# EAGLE board Sensor Board (EAGLE 6.4)
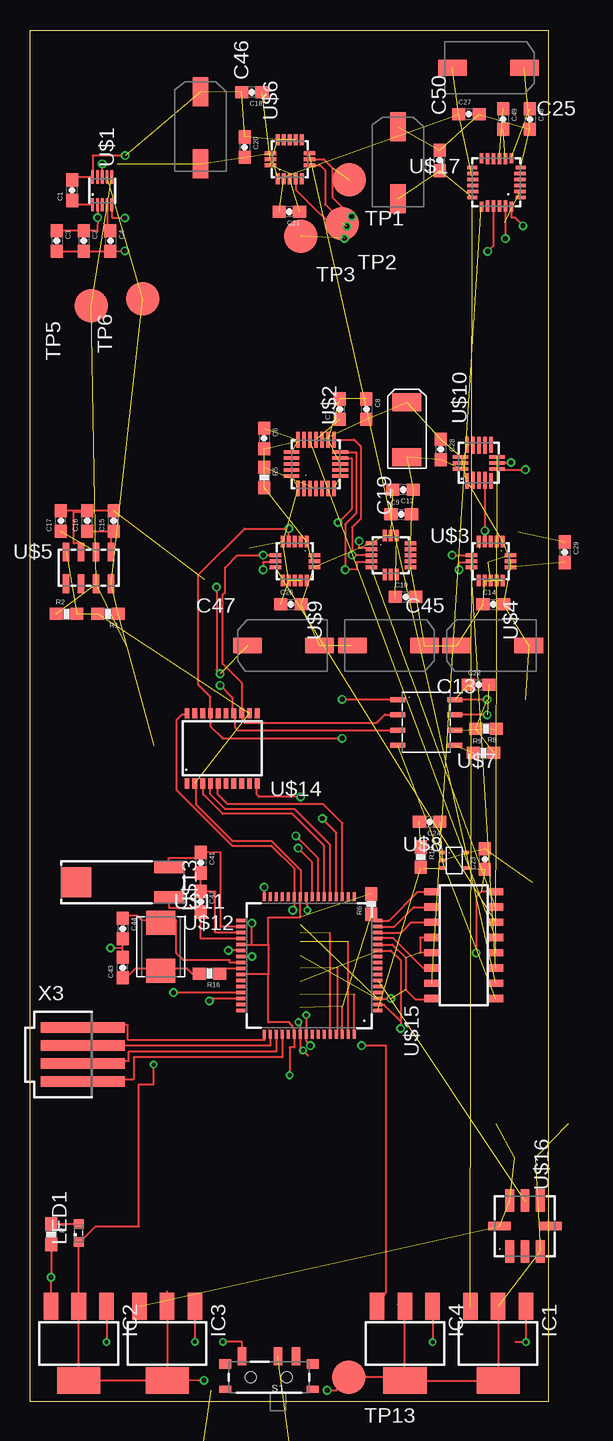
[diagram p0: board, top side]
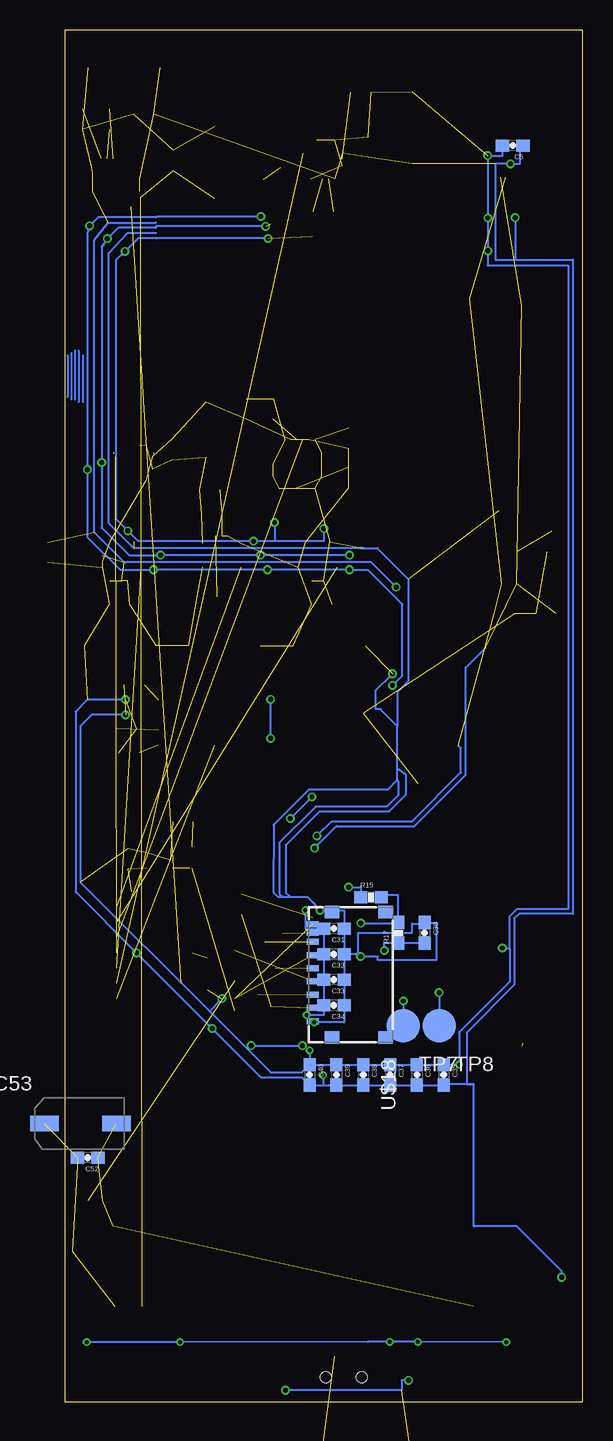
[diagram p1: board, bottom side, seen from below]

Size 43.18 x 114.3 mm. Coordinates in mm from the lower left corner, seen from the top.
Outline: 43.18,0 0,0 0,114.3 43.18,114.3 43.18,0
Copper layers (1*2*15*16): Top 0.035mm / dielectric 0.2mm / layer 2 0.0175mm / dielectric 1.1mm / layer 15 0.0175mm / dielectric 0.2mm / Bottom 0.035mm
Design rules "SeeedStudio_DRU_no_angle_20130527": minimum track width 6mil, minimum drill 12mil, track to track 6mil, track to pad 6mil, pad to pad 6mil, via to via 6mil, smd to smd 0mil, copper to edge 10mil, drill to drill 10mil, minimum pad ring 6mil, minimum via ring 6mil, stop-mask expansion 2mil, vias tented up to drill 25mil, thermal gap 10mil

## Footprints (pad centres in the part's own frame; a part is rotated, then mirrored left to right if it is on the bottom)
BATTCON_20MM_4LEGS = smd 1.778 x 2.54: 1 -11,1.55; 3 11,1.55; P$1 -11,-1.55; P$2 11,-1.55 | smd 13 x 8: 2 0,0
0603-CAP = smd 1.1 x 1: 1 -0.85,0; 2 0.85,0
4.3X7.3SMD = smd 2.4 x 1.3: P$1 -3,0; P$2 3,0
EIA6032 = smd 1.5 x 2.4: P$1 -2.3,0; P$2 2.3,0
SOT223 = smd 1.219 x 2.235: 1 -2.311,-3.099; 2 0,-3.099; 3 2.311,-3.099 | smd 3.6 x 2.2: 4 0,3.099
LED_SML0603 = smd 0.8 x 0.8: A 0.75,0; C -0.75,0
0603-RES = smd 1.1 x 1: 1 -0.85,0; 2 0.85,0
SWITCH-SPST-SMD-A = smd 0.7 x 1.5: 1 -2.25,-1.75; 2 -0.75,-1.75; 3 2.25,-1.75 | smd 1 x 0.6: GND1 -3.65,1; GND3 3.65,1 | smd 1 x 0.8: GND2 -3.65,-1.1; GND4 3.65,-1.1 | hole 0.9: -1.5,0; 1.5,0
TESTPAD(ROUND) = smd 2.794 x 2.794: P$1 0,0
DFN-10(2X2)_HS = smd 1.1 x 0.225: P$1 -1.15,0.8; P$2 -1.15,0.4; P$3 -1.15,0; P$4 -1.15,-0.4; P$5 -1.15,-0.8; P$6 1.15,-0.8; P$7 1.15,-0.4; P$8 1.15,0; P$9 1.15,0.4; P$10 1.15,0.8
QFN-24(4X4)_HS = smd 1.3 x 0.3: P$1 -2.025,1.5; P$2 -2.025,1; P$3 -2.025,0.5; P$4 -2.025,0; P$5 -2.025,-0.5; P$6 -2.025,-1; P$7 -2.025,-1.5; P$13 2.025,-1.5; P$14 2.025,-1; P$15 2.025,-0.5; P$16 2.025,0; P$17 2.025,0.5; P$18 2.025,1; P$19 2.025,1.5 | smd 0.3 x 1.3: P$8 -1,-2.025; P$9 -0.5,-2.025; P$10 0,-2.025; P$11 0.5,-2.025; P$12 1,-2.025; P$20 1,2.025; P$21 0.5,2.025; P$22 0,2.025; P$23 -0.5,2.025; P$24 -1,2.025
LGA-16(3X3)_HS = smd 0.95 x 0.34: P$1 -1.625,1; P$2 -1.625,0.5; P$3 -1.625,0; P$4 -1.625,-0.5; P$5 -1.625,-1; P$9 1.625,-1; P$10 1.625,-0.5; P$11 1.625,0; P$12 1.625,0.5; P$13 1.625,1 | smd 0.34 x 0.95: P$6 -0.5,-1.625; P$7 0,-1.625; P$8 0.5,-1.625; P$14 0.5,1.625; P$15 0,1.625; P$16 -0.5,1.625
LGA-8(5X3)_HS = smd 0.55 x 1.55: P$1 -1.875,-1.325; P$2 -0.625,-1.325; P$3 0.625,-1.325; P$4 1.875,-1.325; P$5 1.875,1.325; P$6 0.625,1.325; P$7 -0.625,1.325; P$8 -1.875,1.325
SOIC-8(5X6.2) = smd 1.27 x 0.41: P$1 -2.365,1.905; P$2 -2.365,0.635; P$3 -2.365,-0.635; P$4 -2.365,-1.905; P$5 2.365,-1.905; P$6 2.365,-0.635; P$7 2.365,0.635; P$8 2.365,1.905
SOT323-5L = smd 0.4 x 0.3: P$1 1,-0.65; P$2 1,0; P$3 1,0.65; P$4 -1,0.65; P$5 -1,-0.65
LGA-16(3X3.25)_HS = smd 1.32 x 0.3: P$1 -1.513,1; P$5 -1.513,-1; P$9 1.513,-1; P$13 1.513,1 | smd 1.425 x 0.3: P$2 -1.462,0.5; P$3 -1.462,0; P$4 -1.462,-0.5; P$10 1.462,-0.5; P$11 1.462,0; P$12 1.462,0.5 | smd 0.3 x 1.3: P$6 -0.5,-1.525; P$7 0,-1.525; P$8 0.5,-1.525; P$14 0.5,1.525; P$15 0,1.525; P$16 -0.5,1.525
S-PQFP-G64 = smd 0.75 x 0.27: P$1 -5.725,3.75; P$2 -5.725,3.25; P$3 -5.725,2.75; P$4 -5.725,2.25; P$5 -5.725,1.75; P$6 -5.725,1.25; P$7 -5.725,0.75; P$8 -5.725,0.25; P$9 -5.725,-0.25; P$10 -5.725,-0.75; P$11 -5.725,-1.25; P$12 -5.725,-1.75; P$13 -5.725,-2.25; P$14 -5.725,-2.75; P$15 -5.725,-3.25; P$16 -5.725,-3.75; P$33 5.725,-3.75; P$34 5.725,-3.25; P$35 5.725,-2.75; P$36 5.725,-2.25; P$37 5.725,-1.75; P$38 5.725,-1.25; P$39 5.725,-0.75; P$40 5.725,-0.25; P$41 5.725,0.25; P$42 5.725,0.75; P$43 5.725,1.25; P$44 5.725,1.75; P$45 5.725,2.25; P$46 5.725,2.75; P$47 5.725,3.25; P$48 5.725,3.75 | smd 0.27 x 0.75: P$17 -3.75,-5.725; P$18 -3.25,-5.725; P$19 -2.75,-5.725; P$20 -2.25,-5.725; P$21 -1.75,-5.725; P$22 -1.25,-5.725; P$23 -0.75,-5.725; P$24 -0.25,-5.725; P$25 0.25,-5.725; P$26 0.75,-5.725; P$27 1.25,-5.725; P$28 1.75,-5.725; P$29 2.25,-5.725; P$30 2.75,-5.725; P$31 3.25,-5.725; P$32 3.75,-5.725; P$49 3.75,5.725; P$50 3.25,5.725; P$51 2.75,5.725; P$52 2.25,5.725; P$53 1.75,5.725; P$54 1.25,5.725; P$55 0.75,5.725; P$56 0.25,5.725; P$57 -0.25,5.725; P$58 -0.75,5.725; P$59 -1.25,5.725; P$60 -1.75,5.725; P$61 -2.25,5.725; P$62 -2.75,5.725; P$63 -3.25,5.725; P$64 -3.75,5.725
CYLINDRICAL-(1.9DIAX6L) = smd 2.5 x 1: P$1 3.875,1.25; P$2 3.875,-1.25 | smd 2.5 x 2.5: P$3 -3.875,0
2-SMD = smd 2 x 2.4: P$1 -2,0; P$2 2,0
TSSOP-(PW)-20 = smd 0.4 x 0.85: P$1 -2.925,-2.925; P$2 -2.275,-2.925; P$3 -1.625,-2.925; P$4 -0.975,-2.925; P$5 -0.325,-2.925; P$6 0.325,-2.925; P$7 0.975,-2.925; P$8 1.625,-2.925; P$9 2.275,-2.925; P$10 2.925,-2.925; P$11 2.925,2.925; P$12 2.275,2.925; P$13 0.975,2.925; P$14 1.625,2.925; P$15 -0.975,2.925; P$16 0.325,2.925; P$17 -0.325,2.925; P$18 -1.625,2.925; P$19 -2.275,2.925; P$20 -2.925,2.925
SOIC-16 = smd 0.6 x 1.27: P$1 -4.445,-2.675; P$2 -3.175,-2.675; P$3 -1.905,-2.675; P$4 -0.635,-2.675; P$5 0.635,-2.675; P$6 1.905,-2.675; P$7 3.175,-2.675; P$8 4.445,-2.675; P$9 4.445,2.675; P$10 3.175,2.675; P$11 1.905,2.675; P$12 0.635,2.675; P$13 -0.635,2.675; P$14 -1.905,2.675; P$15 -3.175,2.675; P$16 -4.445,2.675
LCC-8(5X5)_HS = smd 1.87 x 0.735: P$1 -2.117,1.27; P$2 -2.117,0; P$3 -2.117,-1.27; P$5 2.117,-1.27; P$6 2.117,0; P$7 2.117,1.27 | smd 0.735 x 1.87: P$4 0,-2.117; P$8 0,2.117
LGA-24(4X4)_HS = smd 0.85 x 0.3: P$1 -2.025,1.25; P$6 -2.025,-1.25; P$13 2.025,-1.25; P$18 2.025,1.25 | smd 0.95 x 0.3: P$2 -1.975,0.75; P$3 -1.975,0.25; P$4 -1.975,-0.25; P$5 -1.975,-0.75; P$14 1.975,-0.75; P$15 1.975,-0.25; P$16 1.975,0.25; P$17 1.975,0.75 | smd 0.3 x 0.85: P$7 -1.25,-2.025; P$12 1.25,-2.025; P$19 1.25,2.025; P$24 -1.25,2.025 | smd 0.3 x 0.95: P$8 -0.75,-1.975; P$9 -0.25,-1.975; P$10 0.25,-1.975; P$11 0.75,-1.975; P$20 0.75,1.975; P$21 0.25,1.975; P$22 -0.25,1.975; P$23 -0.75,1.975
SD-105027-101 = smd 0.5 x 1: P$1 3.85,-6.66; P$2 2.75,-6.66; P$3 1.65,-6.66; P$4 0.55,-6.66; P$5 -0.55,-6.66; P$6 -1.65,-6.66; P$7 -2.75,-6.66; P$8 -3.51,-6.66; P$9 -4.21,-6.66 | smd 1.05 x 1.2: P$10 -5.225,-0.6; P$11 -5.225,-5.05; P$12 5.225,-5.05; P$13 5.225,-0.6
87438-04 = smd 7 x 0.85: 1 0,2.25; 2 0,0.75; 3 0,-0.75; 4 0,-2.25

## Placement (x,y rotation side)
BAT1  20mm coincell  [BATTCON_20MM_4LEGS]  12.55,-16.46 180 top  (outside the outline)
C1  100nF  [0603-CAP]  3.5,100.94 90 top
C2  1uF  [0603-CAP]  4.47,96.72 270 top
C3  100nF  [0603-CAP]  2.24,96.72 270 top
C4  100nF  [0603-CAP]  6.71,96.72 270 top
C5  100nF  [0603-CAP]  5.83,104.67 180 bottom
C6  1uF  [0603-CAP]  19.51,80.26 270 top
C7  100nF  [0603-CAP]  25.81,82.7 90 top
C8  1uF  [0603-CAP]  28.04,82.7 270 top
C9  100nF  [0603-CAP]  30.94,73.94 0 top
C10  10nF  [0603-CAP]  31.29,67.06 0 top
C12  10uF  [0603-CAP]  31.09,76 180 top
C13  100nF  [4.3X7.3SMD]  29.87,62.99 0 top
C14  100nF  [0603-CAP]  38.61,66.45 0 top
C15  100nF  [0603-CAP]  6.98,73.39 90 top
C16  10uF  [0603-CAP]  4.78,73.39 90 top
C17  100nF  [0603-CAP]  2.58,73.39 90 top
C18  4.7uF  [0603-CAP]  18.49,109.12 180 top
C19  1uF  [EIA6032]  31.4,80.98 270 top
C20  100nF  [0603-CAP]  17.88,104.53 270 top
C21  0.22uF  [0603-CAP]  21.61,99.16 180 top
C22  0.1uF  [0603-CAP]  37.39,59.74 0 top
C23  0.1uF  [0603-CAP]  37.91,45.21 90 top
C24  1uF  [0603-CAP]  33.31,48.3 180 top
C25  10uF  [4.3X7.3SMD]  38.2,111.15 0 top
C26  100nF  [0603-CAP]  21.74,66.45 0 top
C27  100nF  [0603-CAP]  36.58,107.29 0 top
C28  0.1uF  [0603-CAP]  34.23,79.35 270 top
C29  0.1uF  [0603-CAP]  44.56,70.78 270 top
C30  0.1uF  [0603-CAP]  13.18,39.07 270 bottom
C31  0.1uF  [0603-CAP]  20.73,39.42 180 bottom
C32  0.1uF  [0603-CAP]  20.73,37.29 180 bottom
C33  2.2uF  [0603-CAP]  20.73,35.15 180 bottom
C34  0.1uF  [0603-CAP]  20.73,33.02 180 bottom
C35  0.1uF  [0603-CAP]  11.58,27.23 270 bottom
C36  0.01uF  [0603-CAP]  13.82,27.23 270 bottom
C37  0.1uF  [0603-CAP]  16.05,27.23 270 bottom
C38  0.01uF  [0603-CAP]  18.29,27.23 270 bottom
C39  0.1uF  [0603-CAP]  20.52,27.23 270 bottom
C40  0.01uF  [0603-CAP]  22.76,27.23 270 bottom
C41  24pF  [0603-CAP]  14.22,44.91 270 top
C42  24pF  [0603-CAP]  14.22,41.66 270 top
C43  10pF  [0603-CAP]  7.72,36.17 90 top
C44  10pF  [0603-CAP]  7.72,39.42 270 top
C45  10uF  [4.3X7.3SMD]  38.56,62.99 180 top
C46  10uF  [4.3X7.3SMD]  14.22,106.16 90 top
C47  10uF  [4.3X7.3SMD]  21.13,62.99 180 top
C48  4.7uF  [0603-CAP]  41.66,106.88 270 top
C49  0.22uF  [0603-CAP]  39.42,106.88 270 top
C50  10uF  [4.3X7.3SMD]  30.68,103.23 90 top
C51  100nF  [0603-CAP]  34.14,103.43 90 top
C52  0.1uF  [0603-CAP]  41.25,20.32 180 bottom
C53  4.7uF  [4.3X7.3SMD]  41.86,23.16 180 bottom
IC1  LT1963EST-1.5  [SOT223]  39.01,4.85 180 top
IC2  LT1963EST-1.5  [SOT223]  4.06,4.85 180 top
IC3  LT1963EST-1.5  [SOT223]  11.43,4.85 180 top
IC4  LT1963EST-1.5  [SOT223]  31.24,4.85 180 top
LED1  Green  [LED_SML0603]  4.06,14.05 90 top
R1  10k  [0603-RES]  6.5,65.63 180 top
R2  10k  [0603-RES]  3.05,65.63 0 top
R5  4.7k  [0603-RES]  19.51,77.01 270 top
R6  0  [0603-RES]  28.45,41.45 90 top
R7  10k  [0603-RES]  1.75,13.94 270 top
R8  10k  [0603-RES]  38,56.08 180 top
R9  10k  [0603-RES]  37.8,54.05 0 top
R10  200  [0603-RES]  32.55,45.37 270 top
R15  1M  [0603-RES]  17.64,42.04 0 bottom
R16  0  [0603-RES]  14.96,35.67 180 top
R17  10k  [0603-RES]  15.38,39.07 90 bottom
S1  Power  [SWITCH-SPST-SMD-A]  19.91,2.03 180 top
TP1  TESTPAD(ROUND)  [TESTPAD(ROUND)]  26.62,101.8 0 top
TP2  TESTPAD(ROUND)  [TESTPAD(ROUND)]  26.01,98.15 0 top
TP3  TESTPAD(ROUND)  [TESTPAD(ROUND)]  22.56,97.13 0 top
TP5  TESTPAD(ROUND)  [TESTPAD(ROUND)]  5.09,91.31 270 top
TP6  TESTPAD(ROUND)  [TESTPAD(ROUND)]  9.41,91.92 270 top
TP7  TESTPAD(ROUND)  [TESTPAD(ROUND)]  14.94,31.32 0 bottom
TP8  TESTPAD(ROUND)  [TESTPAD(ROUND)]  11.96,31.32 0 bottom
TP13  TESTPAD(ROUND)  [TESTPAD(ROUND)]  26.57,2.03 0 top
U$1  MAG3110_HS  [DFN-10(2X2)_HS]  6.02,100.9 90 top
U$2  FXAS21000_HS  [QFN-24(4X4)_HS]  23.83,78.13 90 top
U$3  L3GD20H_HS  [LGA-16(3X3)_HS]  30.07,70.53 0 top
U$4  LPS331AP_HS  [LGA-16(3X3)_HS]  38.4,70.03 270 top
U$5  MPL3115A2_HS  [LGA-8(5X3)_HS]  4.89,69.48 180 top
U$6  LSM303D_HS  [LGA-16(3X3)_HS]  21.65,103.53 90 top
U$7  ADT7310  [SOIC-8(5X6.2)]  33.02,56.59 0 top
U$8  STLM20  [SOT323-5L]  35.36,45.1 180 top
U$9  LIS3DH  [LGA-16(3X3)_HS]  22.07,70.03 270 top
U$10  ADXL362  [LGA-16(3X3.25)_HS]  37.41,78.23 90 top
U$11  TM4C1233H6PM  [S-PQFP-G64]  23.27,36.34 180 top
U$12  32.768 kHz  [CYLINDRICAL-(1.9DIAX6L)]  7.72,43.28 0 top
U$13  16.000 MHz  [2-SMD]  10.9,37.89 90 top
U$14  TXB0108  [TSSOP-(PW)-20]  16.01,54.44 0 top
U$15  CD74HC138  [SOIC-16]  36.15,38.03 270 top
U$16  ADXL78  [LCC-8(5X5)_HS]  41.25,14.63 90 top
U$17  LSM9DS0_HS  [LGA-24(4X4)_HS]  38.87,101.6 180 top
U$18  SD-105027-101  [SD-105027-101]  15.85,35.56 270 bottom
X3  87438-04  [87438-04]  4.39,28.92 0 top

## Library data of the parts
BAT1 = SparkFun-Electromechanical; PROD_ID: BATT-10373
C1-C10 C12 C14-C24 C26-C44 C48 C49 C51 C52 R1 R2 R5-R10 R15-R17 = SparkFun-Passives
C13 C25 C45-C47 C50 C53 TP1-TP3 TP5-TP8 TP13 = Kas-Passives
IC1-IC4 = linear-technology; MPN: LT1963EST-1.5; OC_FARNELL: 1663528; OC_NEWARK: 57M7534
LED1 = eagle-ltspice; SPICEMODEL: NONE; SPICEPREFIX: D; SPICETYPE: diode
S1 = SparkFun-Electromechanical
U$1-U$10 U$16 U$17 = Kas-Sensors
U$11 = Kas-Microcontroller
U$12 U$13 = Kas-Crystal
U$14 U$15 = Kas-Buffers & Level Shifters
U$18 = Kas-Connectors
X3 = con-molex; OC_FARNELL: unknown; OC_NEWARK: unknown

## Nets
1.2V: C31.2 C32.2 C33.2 C34.2 IC4.3 U$11.P$25 U$11.P$56
3.0V: C50.P$1 C51.1 IC1.3 U$17.P$18
3.3V: C2.1 C3.1 C5.1 C6.2 C8.2 C9.1 C12.2 C13.P$1 C14.2 C19.P$1 C20.2 C22.1 C23.1 C25.P$1 C26.2 C27.1 C28.1 C29.2 C35.2 C36.2 C37.2 C38.2 C39.2 C40.2 C45.P$1 C46.P$1 C47.P$1 IC2.3 R1.2 R2.2 R5.2 R6.2 R7.2 R8.2 R9.2 R15.2 R17.2 U$1.P$2 U$1.P$8 U$2.P$15 U$2.P$18 U$3.P$1 U$3.P$15 U$3.P$16 U$4.P$1 U$4.P$14 U$4.P$15 U$5.P$4 U$6.P$1 U$6.P$14 U$7.P$8 U$8.P$4 U$9.P$1 U$9.P$14 U$10.P$1 U$10.P$14 U$11.P$2 U$11.P$11 U$11.P$26 U$11.P$37 U$11.P$42 U$11.P$54 U$14.P$2 U$14.P$12 U$15.P$16 U$17.P$15 U$17.P$16 U$17.P$17 U$18.P$4
5.0V: C52.1 C53.P$1 IC3.3 U$16.P$7 U$16.P$8
ADXL78-ST: U$16.P$4
ANALOG-OUT-ADXL78: U$11.P$6 U$16.P$6
ANALOG-OUT-STLM20: R10.2 U$8.P$3 U$11.P$1
CS-ADT7310: U$7.P$4 U$15.P$9
CS-ADXL362: U$10.P$8 U$15.P$12
CS-ENABLE: U$11.P$13 U$15.P$6
CS-FXAS: U$2.P$17 U$15.P$13
CS-LIS3DH: U$9.P$8 U$15.P$14
CS-LPS331: U$4.P$8 U$15.P$11
CS-LSGD: U$3.P$5 U$15.P$15
CS-LSM9D30-G: U$15.P$7 U$17.P$19
CS-LSM9DS0-XM: U$17.P$20
CS-LSM303: U$6.P$8 U$15.P$10
CT-ADT7310: R8.1 U$7.P$6
DEN-L3GD: U$3.P$8
GND: BAT1.2 C1.2 C2.2 C3.2 C4.2 C5.2 C6.1 C7.2 C8.1 C9.2 C10.2 C12.1 C13.P$2 C14.1 C15.2 C16.2 C17.2 C18.2 C19.P$2 C20.1 C22.2 C23.2 C24.1 C25.P$2 C26.1 C27.2 C28.2 C29.1 C30.1 C31.1 C32.1 C33.1 C34.1 C35.1 C36.1 C37.1 C38.1 C39.1 C40.1 C43.2 C44.2 C45.P$2 C46.P$2 C47.P$2 C48.2 C50.P$2 C51.2 C52.2 C53.P$2 IC1.2 IC1.4 IC2.2 IC2.4 IC3.2 IC3.4 IC4.2 IC4.4 LED1.C TP13.P$1 U$1.P$5 U$1.P$10 U$2.P$1 U$2.P$5 U$2.P$6 U$2.P$7 U$2.P$8 U$2.P$9 U$2.P$10 U$2.P$14 U$2.P$19 U$2.P$20 U$2.P$21 U$2.P$22 U$2.P$23 U$2.P$24 U$3.P$9 U$3.P$10 U$3.P$11 U$3.P$12 U$3.P$13 U$4.P$5 U$4.P$10 U$4.P$11 U$4.P$12 U$4.P$13 U$4.P$16 U$5.P$3 U$6.P$5 U$6.P$10 U$6.P$12 U$6.P$13 U$6.P$16 U$7.P$7 U$8.P$2 U$8.P$5 U$9.P$5 U$9.P$10 U$9.P$12 U$10.P$12 U$10.P$13 U$10.P$16 U$11.P$3 U$11.P$12 U$11.P$27 U$11.P$39 U$11.P$55 U$14.P$20 U$15.P$4 U$15.P$5 U$15.P$8 U$16.P$3 U$17.P$2 U$17.P$3 U$17.P$4 U$17.P$5 U$17.P$6 U$18.P$6 U$18.P$9
INT1-ADXL362: U$10.P$11
INT1-FXAS: U$2.P$3
INT1-L3GD: U$3.P$7
INT1-LIS3DH: U$9.P$11
INT1-LSM303: U$6.P$11
INT1-MAG3110: U$1.P$9
INT1-MPL311: U$5.P$6
INT-ADT7310: R9.1 U$7.P$5
LSM9D-DEN-G: U$17.P$10
LSM9D-DRGY-G: U$17.P$12
LSM9D-INT1-XM: U$17.P$13
LSM9D-INT-G: U$17.P$11
MISO-A: U$11.P$21 U$14.P$4
MISO-B: TP2.P$1 U$2.P$13 U$3.P$3 U$4.P$6 U$6.P$6 U$7.P$2 U$9.P$6 U$10.P$7 U$14.P$14 U$17.P$22 U$17.P$23
MOSI-A: U$11.P$22 U$14.P$3
MOSI-B: TP1.P$1 U$2.P$12 U$3.P$4 U$4.P$7 U$6.P$7 U$7.P$3 U$9.P$7 U$10.P$6 U$14.P$13 U$17.P$24
N$1: C1.1 U$1.P$1
N$2: C7.1 U$2.P$16
N$3: C4.1 U$1.P$4
N$4: C10.1 U$3.P$14
N$5: C17.1 U$5.P$2
N$6: C18.1 U$6.P$15
N$7: C21.2 U$6.P$2
N$8: C48.1 U$17.P$7
N$9: C24.2 R10.1
N$10: C30.2 R17.1 U$11.P$38
N$11: C42.2 U$11.P$36 U$12.P$2
N$12: C41.1 U$11.P$34 U$12.P$1
N$13: C41.2 C42.1 U$11.P$35
N$14: C43.1 R16.2 U$13.P$1
N$15: C21.1 U$6.P$3
N$16: C44.1 U$11.P$40 U$13.P$2
N$17: R16.1 U$11.P$41
N$18: R15.1 U$11.P$32
N$19: BAT1.1 S1.2
N$21: C49.2 U$17.P$8
N$22: C49.1 U$17.P$9
N$23: IC1.1 IC2.1 IC3.1 IC4.1 S1.3
N$25: C15.1 C16.1 U$5.P$1
N$27: LED1.A R7.1
RST_B: R5.1 U$2.P$4
SCL-0: R1.1 TP6.P$1 U$1.P$7 U$5.P$8 U$11.P$23
SCLK-A: U$11.P$19 U$14.P$5
SCLK-B: TP3.P$1 U$2.P$11 U$3.P$2 U$4.P$4 U$6.P$4 U$7.P$1 U$9.P$4 U$10.P$4 U$14.P$15 U$17.P$21
SD-CARD-INSERT: U$11.P$60 U$18.P$8
SD-CS: R6.1 U$11.P$62 U$18.P$2
SD-MISO: U$11.P$63 U$18.P$7
SD-MOSI: U$11.P$64 U$18.P$3
SD-SCLK: U$11.P$61 U$18.P$5
SDA-0: R2.1 TP5.P$1 U$1.P$6 U$5.P$7 U$11.P$24
SPI-ADDR0: U$11.P$16 U$15.P$1
SPI-ADDR1: U$11.P$15 U$15.P$2
SPI-ADDR2: U$11.P$14 U$15.P$3
SPI-ENABLE: U$11.P$20 U$14.P$10
SWCLK: U$11.P$52 X3.4
SWDIO: U$11.P$51 X3.3
SWO: U$11.P$49 X3.1
TDI: U$11.P$50 X3.2
U0RX: U$11.P$17
U0TX: U$11.P$18
U1RX: TP8.P$1 U$11.P$45
U1TX: TP7.P$1 U$11.P$46

## Tracks (layer width: path | path; a pad name or v marks a point on that pad's centre or on a via)
1.2V  (via drill 0.33 pad 0.15, 0.41)
  Top 0.152: U$11.P$25 23.01,41.48 23.11,41.48 v23.11,40.95 | v23.02,32.21 23.02,31.55 23.02,31.31 23.01,31.3 U$11.P$56 23.02,30.46 23.02,30.07 v23.37,29.67 | IC4.3 29.67,9.12 29.67,29.67 v27.64,29.67
  Bottom 0.152: v23.11,40.95 23.11,39.41 C31.2 C32.2 C33.2 C34.2 21.58,32.22 21.58,32.21 22.61,32.21 v23.02,32.21 | v27.64,29.67 v23.37,29.67
3.0V  (3 unrouted)
3.3V  (via drill 0.33 pad 0.15, 0.41)  (45 unrouted)
  Top 0.152: v21.64,27.19 21.64,29.52 22.02,29.52 U$11.P$54 22.02,31.09 21.58,31.6 19.87,31.6 19.87,35.59 | 19.87,35.59 U$11.P$42 | 19.87,38.09 U$11.P$37 18.49,38.09 v18.49,39.88 | 19.87,38.09 19.87,35.59 | C3.1 C2.1 4.88,97.57 5.62,97.57 v5.63,98.66 U$1.P$2 | U$1.P$2 5.62,99.95 U$1.P$2 | U$1.P$2 | U$1.P$8 | U$1.P$8 v6.02,103.15 | 19.87,38.09 19.87,40.35 22.52,40.35 U$11.P$26 22.55,42.1 22.55,44.3 20.12,46.74 16.87,46.74 13.82,49.78 13.82,51.43 U$14.P$2 | v38.1,58.5 U$7.P$8 | IC2.3 v1.75,10.36 R7.2 | U$11.P$2 29.5,33.09 30.89,31.7 | 30.89,31.7 v30.89,31.09 | U$11.P$11 30.08,37.59 30.89,36.78 30.89,31.7 | U$15.P$16 37.6,42.48 37.19,42.06 v37.19,37.39
  Bottom 0.152: 9.07,26.44 9.07,14.61 5.49,14.61 1.75,10.87 v1.75,10.36 | 9.07,26.44 11.58,26.44 C35.2 C36.2 C37.2 C38.2 C39.2 21.13,26.38 | 21.64,26.38 C40.2 23.41,27.03 26.82,27.03 v30.89,31.09 v37.19,37.39 42.27,42.47 42.27,57.51 41.27,58.5 v38.1,58.5 | 21.64,26.38 21.13,26.38 | v21.64,27.19 21.64,26.38 | v5.63,98.66 5.63,98.75 5.63,95.16 | 5.63,95.16 0.81,95.16 0.81,40.64 5.31,40.64 5.69,40.26 5.69,34.75 9.68,30.75 9.68,26.45 9.07,26.44 | 5.63,95.16 7.27,95.16 7.27,103.15 v6.02,103.15 5.22,103.15 5.22,104.65 5.08,104.67 C5.1 | v18.49,39.88 15.18,39.88 R17.2 15.38,42.2 16.79,42.21 R15.2 | 20.93,26.18 21.13,26.38
5.0V  (4 unrouted)
ANALOG-OUT-ADXL78  (1 unrouted)
  Top 0.152: 29,35.08 U$11.P$6
ANALOG-OUT-STLM20  (2 unrouted)
  Top 0.152: U$8.P$3 34.15,44.44 | 32.76,44.44 32.56,44.45 R10.2
CS-ADT7310  (1 unrouted)
CS-ADXL362  (1 unrouted)
CS-ENABLE
  Top 0.152: U$15.P$6 32.76,36.12 30.28,38.61 29.01,38.61 U$11.P$13
CS-FXAS  (1 unrouted)
CS-LIS3DH  (1 unrouted)
CS-LPS331  (1 unrouted)
CS-LSGD  (1 unrouted)
CS-LSM9D30-G  (1 unrouted)
CS-LSM303  (1 unrouted)
CT-ADT7310  (1 unrouted)
GND  (via drill 0.33 pad 0.15, 0.41)  (73 unrouted)
  Top 0.152: U$11.P$27 | v22.76,29.26 22.52,29.25 22.52,30.6 U$11.P$55 22.52,31.6 22.46,31.6 v22.37,31.61 | IC1.2 IC1.4 IC4.4 | IC3.4 IC3.2 11.43,9.2 | v10.3,28.08 10.29,26.44 9.07,26.44 9.07,14.61 5.49,14.61 4.06,13.18 | 7.72,37.8 C44.2 | U$11.P$39 18.5,37.09 v18.5,37.1 | IC4.4 30.91,2.03 TP13.P$1 | 30.68,8.11 IC4.2 IC4.4 | 25.75,1.77 TP13.P$1 | v14.5,1.77 IC3.4 | v24.77,0.95 25.53,0.94 TP13.P$1 | U$15.P$4 32.52,38.67 32.52,37.4 U$15.P$5 | 33.47,33.62 U$15.P$8 33.41,33.53 32.11,33.53 31.29,34.34 31.29,36.98 30.19,38.09 U$11.P$12 | C3.2 C2.2 C4.2 v7.9,95.9 | C1.2 3.3,102.05 U$1.P$10 5.22,103.83 v7.92,103.83 | U$5.P$3 4.26,71.53 3.66,71.53 3.66,74.17 4.78,74.17 C16.2 | C16.2 C17.2 | C15.2 C16.2 | U$1.P$5 6.82,99.95 6.82,98.69 6.86,98.65 v7.9,98.64 | C43.2 7.72,37.8 | 7.72,37.8 v6.71,37.8 | U$3.P$13 U$3.P$12 U$3.P$11 U$3.P$10 U$3.P$9 | 13.21,57.71 13.21,57.52 U$14.P$20 13.21,57.24 12.66,57.23 12.19,56.77 12.19,51 16.87,46.33 20.12,46.33 22.02,44.43 U$11.P$27 | v15.54,67.87 15.54,60.96 v15.85,60.66 | U$11.P$27 | U$11.P$27 22.02,41.07 v21.89,40.95 | v38.1,57.23 U$7.P$7 | 4.06,13.18 IC2.2 IC2.4 IC3.4 | LED1.C 3.92,13.04 4.06,13.18 | U$11.P$3 v30.07,33.59 | 22.55,29.06 v22.76,29.26 | 23.16,28.85 v22.76,29.26
  Bottom 0.152: v21.89,40.95 19.88,40.95 C31.1 C32.1 | C32.1 C33.1 C34.1 19.88,31.6 v22.37,31.61 | C40.1 C39.1 C38.1 C37.1 C36.1 C35.1 v10.3,28.08 10.29,30.8 6.1,34.99 6.1,37.8 | v22.76,29.26 C40.1 | 18.92,37.29 18.72,37.3 v18.5,37.1 18.5,37.08 17.07,37.08 17.07,36.78 12.19,36.78 12.19,39.92 C30.1 12.97,40.03 | 18.92,37.29 C32.1 | v14.5,1.77 15.09,1.77 15.09,0.95 v24.77,0.95 | v6.71,37.8 6.1,37.8 | 6.1,37.8 6.1,40.44 5.49,41.05 1.22,41.05 1.22,94.69 7.92,94.69 v7.9,95.9 v7.9,98.64 7.9,103.83 v7.92,103.83 6.68,103.83 C5.2 | 18.92,37.29 18.69,37.29 18.69,39.09 14.22,39.09 14.22,39.83 13.01,39.83 | 35.56,98.25 39.55,98.25 40.69,96.8 40.69,72.43 38.19,69.93 17.6,69.93 v15.54,67.87 | 35.56,97.38 37.9,97.38 39.5,95.71 39.5,73.2 37.42,71.12 18.29,71.11 17.11,71.11 14.53,68.54 14.53,60.05 15.44,59.13 15.44,56.29 | v15.85,60.66 17.27,59.23 17.27,57.71 16.87,57.71 15.44,56.29 | 22.02,41.07 v21.89,40.95 | v21.89,40.95 22.52,41.6 22.97,42.06 24.38,42.06 | 15.44,51.82 15.34,51.61 15.34,50.58 16.34,49.58 22.25,49.58 25.27,46.56 25.27,42.34 24.99,42.06 | 15.44,51.82 15.44,52.73 | 15.44,52.73 15.44,56.29 | 15.44,52.73 14.73,52.23 14.73,50.59 16.15,49.17 21.95,49.17 24.76,46.37 24.76,42.42 24.74,42.42 24.38,42.06 | 15.44,51.82 16.26,51 22.81,51 25.75,48.06 25.77,42.42 25.76,42.42 25.4,42.06 24.99,42.06 | 24.99,42.06 24.38,42.06 | v38.1,57.23 40.92,57.23 41.86,56.29 41.86,43.28 31.09,32.51 | 31.09,32.51 26.01,27.43 23.41,27.43 C40.1 | v30.07,33.59 31.09,32.51
INT-ADT7310  (1 unrouted)
MISO-A
  Top 0.152: U$11.P$21 25.01,46.41 22.05,49.38 16.26,49.38 15.04,50.6 U$14.P$4
MISO-B  (via drill 0.41)  (1 unrouted)
  Top 0.152: v19.43,70.53 U$9.P$6 20.42,70.51 17.27,70.51 16.26,69.49 16.26,67.46 16.05,67.26 16.05,61.47 17.68,59.84 17.68,57.36 | v35.18,70.53 U$4.P$6 | U$3.P$3 28.19,70.53 28.19,70.51 v26.85,70.53 26.85,72.85 27.56,73.56 27.56,79.61 27.01,80.16 U$2.P$13 | U$10.P$7 v40.08,78.26 | v39.61,96.91 39.62,96.92 U$17.P$23 U$17.P$22 | v26.42,97.94 24.59,99.77 24.59,102.62 24.17,103.03 U$6.P$6 | U$14.P$14 17.68,57.36 | 19.43,70.31 v19.43,70.53 | 19.41,70.51 v19.43,70.53 | 17.68,57.36 17.68,56.74 17.87,56.55 28.89,56.55 29.57,57.24 30.64,57.24 U$7.P$2
  Bottom 0.152: v19.43,70.53 v26.85,70.53 v35.18,70.53 37.8,70.54 40.08,72.81 v40.08,78.26 40.08,96.24 v39.61,96.91 38.71,97.81 35.56,97.81 35.56,97.94 v26.42,97.94
MOSI-A
  Top 0.152: U$11.P$22 24.51,46.3 21.84,48.97 16.05,48.97 14.43,50.6 14.43,51.47 U$14.P$3
MOSI-B  (via drill 0.41)  (1 unrouted)
  Top 0.152: 20.52,70.03 U$9.P$7 20.73,70.03 20.73,69.94 19.43,69.94 v19.43,69.32 19.43,69.29 | v35.76,69.32 35.76,69.94 36.4,69.94 36.4,70.03 U$4.P$7 | U$3.P$4 28.25,70.03 28.04,69.94 27.23,69.94 27.23,69.34 v26.26,69.32 26.26,73.09 27.18,74.01 27.18,79.13 U$2.P$12 | U$10.P$6 39.37,77.73 39.57,77.66 v41.27,77.66 | U$17.P$24 40.12,98.68 40.39,98.68 v41.08,97.98 | v26.82,98.75 25.2,100.38 25.2,102.82 24.49,103.53 U$6.P$7 | U$7.P$3 17.3,55.96 17.07,56.19 17.07,57.36 U$14.P$13 16.87,57.48 16.87,58.67 v15.85,59.69
  Bottom 0.152: v26.82,98.75 35.48,98.75 35.56,98.68 40.39,98.68 v41.08,97.98 41.27,97.36 v41.27,77.66 41.27,72.04 38.56,69.32 v35.76,69.32 v26.26,69.32 v19.43,69.32 19.4,69.29 17.88,69.29 15.04,66.45 15.04,60.5 v15.85,59.69
N$1
  Top 0.152: U$1.P$1 3.3,99.75 C1.1
N$2  (1 unrouted)
N$3
  Top 0.152: U$1.P$4 6.42,99.95 6.42,97.89 6.7,97.89 C4.1
N$4  (1 unrouted)
N$5  (1 unrouted)
N$6  (1 unrouted)
N$7  (1 unrouted)
N$8  (1 unrouted)
N$9  (1 unrouted)
N$10  (via drill 0.41)
  Top 0.152: U$11.P$38 v16.54,37.59
  Bottom 0.152: v16.54,37.59 16.53,38.22 R17.1 C30.2
N$11
  Top 0.152: U$12.P$2 11.6,41.12 14.26,41.12 C42.2 14.22,38.59 U$11.P$36
N$12
  Top 0.152: U$12.P$1 11.58,45.31 14.22,45.31 C41.1 15.89,45.76 15.89,39.57 17.54,39.57 U$11.P$34
N$13
  Top 0.152: C41.2 C42.1 14.22,42.47 15.44,42.47 15.44,39.09 U$11.P$35
N$14
  Top 0.152: R16.2 13.52,35.67 13.11,36.08 10.9,36.08 | 10.9,36.08 U$13.P$1 | 10.9,36.08 8.78,36.08 8.22,35.52 7.52,35.52 C43.1
N$15  (1 unrouted)
N$16
  Top 0.152: U$11.P$40 16.66,36.59 16.66,36.78 12.79,36.78 12.19,37.38 12.19,40.1 U$13.P$2 9.32,40.09 8.94,40.48 7.52,40.48 C44.1
N$17
  Top 0.152: U$11.P$41 15.81,36.09 R16.1
N$18  (via drill 0.41)
  Top 0.152: U$11.P$32 19.51,42.06 v19.51,42.88
  Bottom 0.152: v19.51,42.88 18.49,42.88 R15.1
N$19  (1 unrouted)
N$20
  Bottom 0.152: 42.32,87.58 42.32,83.52
N$21  (1 unrouted)
N$22  (1 unrouted)
N$23  (via drill 0.33 pad 0.15)
  Top 0.152: 17.65,3.79 S1.3 17.68,3.78 17.68,4.97 v16.08,4.97 | 40.46,4.95 v41.33,4.95 IC1.1 | IC2.1 v6.38,4.95 | IC3.1 v13.74,4.98 | IC4.1 v33.55,4.95
  Bottom 0.152: v6.38,4.95 v13.74,4.98 v16.08,4.97 17.91,4.97 v33.55,4.95 v41.33,4.95
N$24
  Bottom 0.152: 42.01,87.58 42.01,83.31
N$25
  Top 0.152: C16.1 C15.1 6.98,72.22 6.75,72.22 6.75,70.6 U$5.P$1
N$27
  Top 0.152: LED1.A R7.1
N$28
  Bottom 0.152: 42.62,87.38 42.62,83.52
N$29
  Bottom 0.152: 42.93,87.17 42.93,83.72
N$30
  Bottom 0.152: 41.66,87.17 41.66,83.31
RST_B  (1 unrouted)
SCL-0  (via drill 0.41)  (4 unrouted)
  Top 0.152: U$11.P$23 24.02,45.27 v22.15,47.14
  Bottom 0.152: v22.15,47.14 20.93,48.36 14.22,48.36 10.16,52.43 10.16,54.46 10.36,54.66
SCLK-A
  Top 0.152: U$11.P$19 26.02,48.2 24.43,49.78 16.46,49.78 15.65,50.6 15.65,51.48 U$14.P$5
SCLK-B  (via drill 0.41)  (1 unrouted)
  Top 0.152: U$4.P$4 v37.91,72.57 U$10.P$4 | U$3.P$2 28.45,71.13 27.43,71.13 v27.43,71.7 | v25.68,73.25 26.8,74.37 26.8,78.63 U$2.P$11 25.85,78.56 | U$9.P$4 v21.57,72.75 17.88,72.75 14.02,68.89 14.02,59.74 15.04,58.73 U$14.P$15 15.03,56.29 16.05,55.27 v26.01,55.27 | 38.63,99.62 U$17.P$21 38.61,99.62 38.61,96.32 v38.14,95.85 | U$6.P$4 22.15,100.99 v26.21,96.93 | U$7.P$1 30.63,58.52 v26.01,58.52
  Bottom 0.152: v21.57,72.75 21.57,71.7 25.68,71.7 | 37.03,71.7 v27.43,71.7 25.68,71.7 | 37.03,71.7 v37.91,72.57 | v25.68,73.25 25.68,71.7 | 37.03,71.7 38.91,73.58 38.91,95.12 v38.14,95.85 37.03,96.95 35.56,96.95 35.53,96.93 v26.21,96.93 | v26.01,55.27 v26.01,58.52
SD-CARD-INSERT  (1 unrouted)
  Top 0.152: U$11.P$60 25.02,39.01
SD-CS  (2 unrouted)
  Top 0.152: U$11.P$62 26.02,32.93
SD-MISO  (1 unrouted)
  Top 0.152: 26.49,30.61 U$11.P$63 26.52,38.3
SD-MOSI  (1 unrouted)
  Top 0.152: U$11.P$64 27.03,33.93
SD-SCLK  (1 unrouted)
  Top 0.152: 25.6,36.17 25.6,30.52 U$11.P$61
SDA-0  (via drill 0.41)  (4 unrouted)
  Top 0.152: U$11.P$24 23.52,44.96 v22.35,46.13
  Bottom 0.152: 8.13,62.79 9.75,61.16 9.75,52.22 14.02,47.95 20.52,47.95 v22.35,46.13
SPI-ADDR0
  Top 0.152: U$11.P$16 29.93,40.09 32.31,42.47 U$15.P$1
SPI-ADDR1
  Top 0.152: U$11.P$15 30.36,39.59 31.98,41.21 U$15.P$2
SPI-ADDR2
  Top 0.152: U$11.P$14 30.93,39.09 31.77,39.94 U$15.P$3
SPI-ENABLE  (via drill 0.41)
  Top 0.152: U$11.P$20 25.53,47.42 v24.36,48.59 | v22.55,50.39 19.1,50.39 18.9,50.6 18.9,51.48 U$14.P$10
  Bottom 0.152: v24.36,48.59 v22.55,50.39
SWCLK
  Top 0.152: U$11.P$52 21.03,28.68 8.64,28.68 8.64,26.87 5,26.87 X3.4
SWDIO
  Top 0.152: U$11.P$51 20.52,29.16 8.23,29.16 8.23,28.38 5,28.38 X3.3
SWO
  Top 0.152: U$11.P$49 19.53,30.61 19.53,30.12 8.15,30.12 8.15,31.36 5,31.36 5,31.37 X3.1
TDI  (1 unrouted)
  Top 0.152: U$11.P$50 20.02,29.64 5.08,29.64 | 5,29.87 X3.2
U1RX  (via drill 0.41)
  Top 0.152: U$11.P$45 v11.96,34.09
  Bottom 0.152: v11.96,34.09 TP8.P$1
U1TX  (via drill 0.41)
  Top 0.152: U$11.P$46 14.94,33.59 v14.94,33.38
  Bottom 0.152: v14.94,33.38 TP7.P$1